# EAGLE board SerLCD_16x4_pb-v01 (EAGLE 7.6.0)
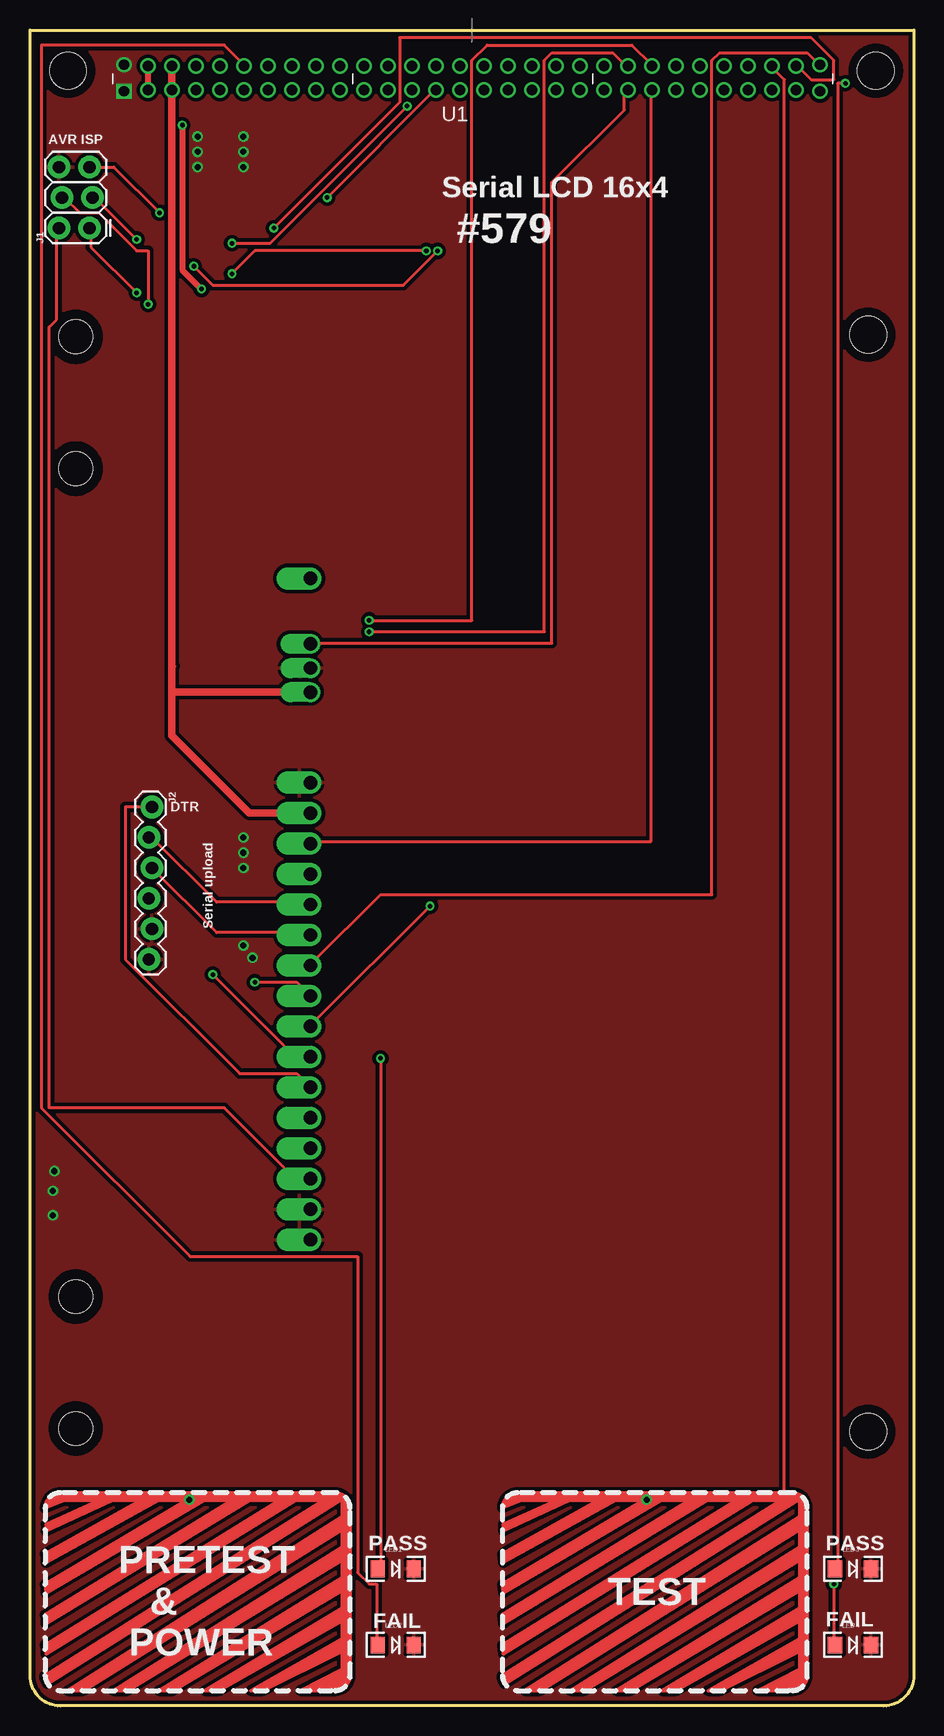
[diagram p0: board, top side]
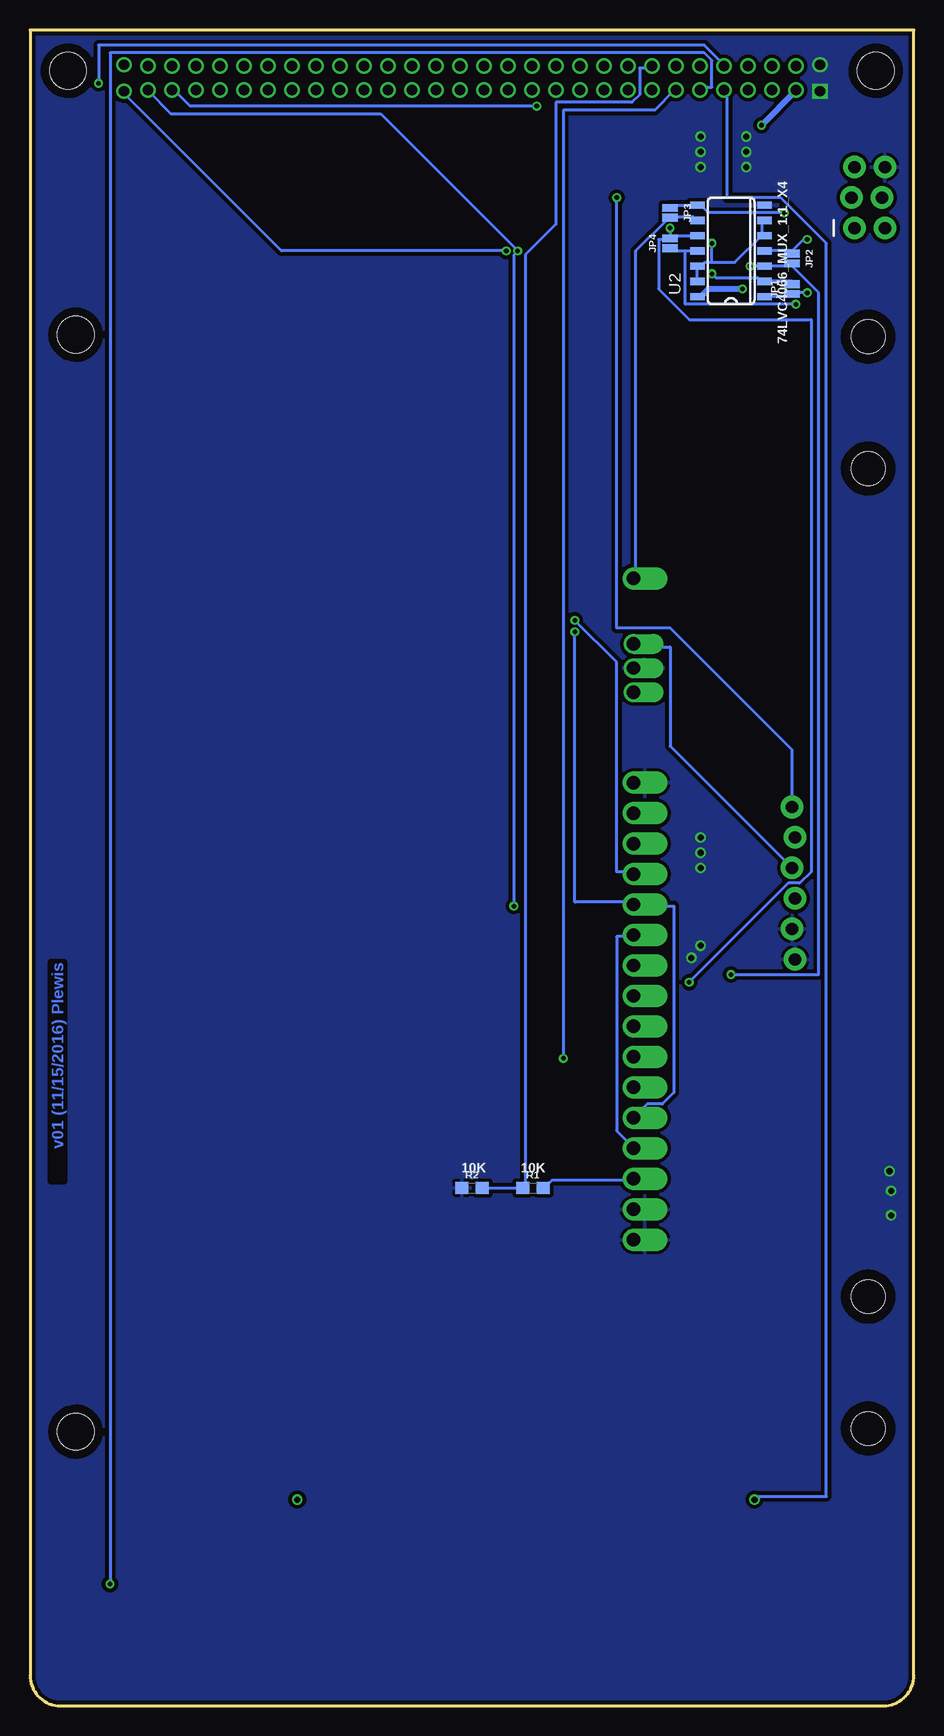
[diagram p1: board, bottom side, seen from below]

Size 73.66 x 139.7 mm. Coordinates in mm from the lower left corner, seen from the top.
Outline: 2.54,0 arc-90 0,2.54 0,139.7 73.66,139.7 73.66,2.54 arc-90 71.12,0 2.54,0
Copper layers (1*16): Top 0.035mm / dielectric 1.5mm / Bottom 0.035mm
Design rules "SparkFun-2-layer-TIGHT *": minimum track width 10mil, minimum drill 15mil, track to track 7mil, track to pad 7mil, pad to pad 7mil, via to via 7mil, smd to smd 7mil, copper to edge 7mil, drill to drill 7mil, minimum pad ring 7mil, minimum via ring 7mil, stop-mask expansion 4mil, vias tented up to drill 25mil, thermal gap 10mil
Net classes: 1 vcc1: width 0.203 mm; 3 VCC2: width 0.381 mm, drill 0.508 mm, clearance 0.254 mm to class 0; 8 eight_mil: width 0.203 mm, clearance 0.127 mm; 9 twelve_mil: width 0.305 mm, clearance 0.127 mm; 10 twenty_mil: width 0.508 mm, clearance 0.127 mm; 11 thirty_mil: width 0.762 mm, clearance 0.127 mm; 13 20_mil: width 0.508 mm, drill 0.508 mm

## Footprints (pad centres in the part's own frame; a part is rotated, then mirrored left to right if it is on the bottom)
CAPSENSE_BUTTON_PADS_ONLY = drill 0.508: CAPSENSE_PAD -0.686,7.036
2X3_LOCK = drill 1.016 pad 1.88: 1 0,0.127; 2 0,2.667; 3 2.54,-0.127; 4 2.54,2.413; 5 5.08,0.127; 6 5.08,2.667
1X06_LOCK = drill 1.016 pad 1.88: 1 0,0; 2 2.54,-0.254; 3 5.08,0; 4 7.62,-0.254; 5 10.16,0; 6 12.7,-0.254
SER_LCD_16X2 = drill 1.118 pad 1.88 offset: P$1 9.652,33.782; P$2 12.192,33.782; P$3 14.732,33.782; P$4 17.272,33.782; P$5 19.812,33.782; P$6 22.352,33.782; P$7 24.892,33.782; P$8 27.432,33.782; P$9 29.972,33.782; P$10 32.512,33.782; P$11 35.052,33.782; P$12 37.592,33.782; P$13 40.132,33.782; P$14 42.672,33.782; P$15 45.212,33.782; P$16 47.752,33.782; P$20 64.77,33.782 | drill 1.118 pad 1.524 offset: P$17 55.296,33.782; P$18 57.302,33.782; P$19 59.309,33.782
SMT-JUMPER_2_NC_PASTE_NO-SILK = smd 0.635 x 1.27: 1 -0.406,0; 2 0.406,0
LED-1206 = smd 1.2 x 1.4: A -1.5,0; C 1.5,0
0603 = smd 1.1 x 1: 1 -0.85,0; 2 0.85,0
FLYING_JALAPENO_V2_M = drill 0.85 square: 1 -29,-5.1 | drill 0.85: 2 -27,-5; 3 -25,-5; 4 -23,-5; 5 -21,-5; 6 -19,-5; 7 -17,-5; 8 -15,-5; 9 -13,-5; 10 -11,-5; 11 -9,-5; 12 -7,-5; 13 -5,-5; 14 -3,-5; 15 -1,-5; 16 1,-5; 17 3,-5; 18 5,-5; 19 7,-5; 20 9,-5; 21 11,-5; 22 13,-5; 23 15,-5; 24 17,-5; 25 19,-5; 26 21,-5; 27 23,-5; 28 25,-5; 29 27,-5; 30 29,-5.1; 31 -29,-2.9; 32 -27,-3; 33 -25,-3; 34 -23,-3; 35 -21,-3; 36 -19,-3; 37 -17,-3; 38 -15,-3; 39 -13,-3; 40 -11,-3; 41 -9,-3; 42 -7,-3; 43 -5,-3; 44 -3,-3; 45 -1,-3; 46 1,-3; 47 3,-3; 48 5,-3; 49 7,-3; 50 9,-3; 51 11,-3; 52 13,-3; 53 15,-3; 54 17,-3; 55 19,-3; 56 21,-3; 57 23,-3; 58 25,-3; 59 27,-3; 60 29,-2.9 | hole 3.048: 33.655,-3.404; -33.655,-3.404
SO14 = smd 0.6 x 1.2: 1 -3.175,-2.8; 2 -1.905,-2.8; 3 -0.635,-2.8; 4 0.635,-2.8; 5 1.905,-2.8; 6 3.175,-2.8; 7 4.445,-2.8; 8 4.445,2.8; 9 3.175,2.8; 10 1.905,2.8; 11 0.635,2.8; 12 -0.635,2.8; 13 -1.905,2.8; 14 -3.175,2.8
STAND-OFF-TIGHT = hole 3.048: 0,0
GOLD_HINDGE = hole 2.794: 3.81,4.077; 3.81,15.07

## Placement (x,y rotation side)
1  CAPSENSE_BUTTON_PAD_ONLY  [CAPSENSE_BUTTON_PADS_ONLY]  13.97,10.16 0 top
2  CAPSENSE_BUTTON_PAD_ONLY  [CAPSENSE_BUTTON_PADS_ONLY]  52.07,10.16 0 top
J1  AVR_PROG  [2X3_LOCK]  5.08,123.19 90 top
J2  [1X06_LOCK]  10.16,74.93 270 top
J3  SER_LCD16X2  [SER_LCD_16X2]  57.15,29.21 90 top
JP1  MISO  [SMT-JUMPER_2_NC_PASTE_NO-SILK]  10.16,118.11 90 bottom
JP2  SCK  [SMT-JUMPER_2_NC_PASTE_NO-SILK]  10.16,120.65 270 bottom
JP3  RST  [SMT-JUMPER_2_NC_PASTE_NO-SILK]  20.32,124.46 270 bottom
JP4  MOSI  [SMT-JUMPER_2_NC_PASTE_NO-SILK]  20.32,121.92 90 bottom
LED1  [LED-1206]  30.48,11.43 0 top
LED2  [LED-1206]  30.48,5.08 0 top
LED3  [LED-1206]  68.58,11.43 0 top
LED4  [LED-1206]  68.58,5.08 0 top
R1  10k  [0603]  31.75,43.18 0 bottom
R2  10k  [0603]  36.83,43.18 0 bottom
U1  5V Flying Jalapeno  [FLYING_JALAPENO_V2_M]  36.83,139.7 0 top
U2  74LVC4066_MUX_1:1_X4  [SO14]  15.24,120.65 90 bottom
U$3  [STAND-OFF-TIGHT]  69.85,114.3 0 top
U$6  GOLD_HINDGEPB  [GOLD_HINDGE]  0,99.06 0 top
U$7  GOLD_HINDGEPB  [GOLD_HINDGE]  0,19.05 0 top
U$8  [STAND-OFF-TIGHT]  69.85,22.86 0 top

## Library data of the parts
1 2 LED1-LED4 U1 U2 U$6 U$7 = Testing
J1 J2 = SparkFun-Connectors
J3 = SerLCD_dimensions
JP1-JP4 = SparkFun-Jumpers
R1 R2 = SparkFun-Resistors; PROD_ID: RES-00824
U$3 U$8 = SparkFun

## Nets
3.3_VCC: J1.2 J3.P$3 R1.2
5V_VIN [twenty_mil]: U1.2 U1.32 U2.14
CS: J3.P$10 U1.60
DTR_FJ: J2.1 J3.P$6 U1.14
GND [twelve_mil]: J1.6 J2.5 J2.6 J3.P$1 J3.P$2 J3.P$16 J3.P$18 LED1.C LED2.C LED3.C LED4.C R2.1 U1.1 U1.31 U2.7
MISO: J3.P$8 JP1.2 U1.29 U2.2
MISO_P: J1.1 JP1.1 U2.1
MOSI: J3.P$9 JP4.2 U1.59 U2.10
MOSI_P: J1.4 JP4.1 U2.11
N$1 [eight_mil]: 1.CAPSENSE_PAD U1.5
N$2: 2.CAPSENSE_PAD U1.58
N$3 [eight_mil]: LED1.A U1.7
N$4 [eight_mil]: LED2.A U1.36
N$5: LED3.A U1.35
N$6: LED4.A U1.6
N$7: R1.1 R2.2 U1.38
PGM_SWITCH_EN: U1.28 U2.5 U2.6 U2.12 U2.13
RAW_VIA_V2: J3.P$15 J3.P$17 U1.3 U1.33
RST: J3.P$20 JP3.2 U2.9
RST_P: J1.5 JP3.1 U2.8
RX1_FJ: J2.2 J3.P$5 J3.P$12 U1.52
SCK: J3.P$7 JP2.2 U1.30 U2.3
SCK_P: J1.3 JP2.1 U2.4
SCL: J3.P$13 U1.53
SDA: J3.P$14 U1.23
TX1_FJ: J2.3 J3.P$4 J3.P$11 J3.P$19 U1.22

## Tracks (layer width: path | path; a pad name or v marks a point on that pad's centre or on a via)
3.3_VCC
  Top 0.254: J1.2 2.22,123.19 2.22,115.57 1.59,114.94 1.59,49.85 16.19,49.85 21.91,44.13 23.18,44.13 J3.P$3
  Bottom 0.254: R1.2 30.8,43.18 30.16,43.81 23.5,43.81 J3.P$3
5V_VIN  (via drill 0.38)
  Top 0.508: v14.29,118.11 12.7,119.7 v12.7,131.76 | U1.32 9.84,136.53 9.84,134.94 U1.2
  Bottom 0.508: v14.29,118.11 17.14,118.11 17.78,117.47 U2.14 | v12.7,131.76 9.84,134.62 U1.2
CS
  Top 0.254: U1.60 65.72,136.84 64.77,137.79 57.47,137.79 56.83,137.16 56.83,67.63 29.21,67.63 23.5,61.91 J3.P$10
DTR_FJ  (via drill 0.38)
  Top 0.254: v24.77,125.73 33.66,134.62 U1.14 | J3.P$6 22.23,52.7 17.46,52.7 7.94,62.23 7.94,74.93 J2.1
  Bottom 0.254: v24.77,125.73 24.77,89.85 20.32,89.85 10.16,79.69 J2.1
GND  (via drill 0.51)
  other vias: 13.97,128.27 13.97,129.54 13.97,130.81 17.78,130.81 17.78,129.54 17.78,128.27 17.78,72.39 17.78,71.12 17.78,69.85 17.78,63.37 18.54,62.36 2.03,44.58 1.91,42.93 1.91,40.89
  pour Bottom (isolate 0.305): 0,0 0,139.7 73.66,139.7 73.66,0
  pour Top (isolate 0.305): 0,0 0,139.7 73.66,139.7 73.66,0
MISO  (via drill 0.38)
  Top 0.254: v16.83,119.38 18.73,121.28 v33.02,121.28 | v33.34,66.67 23.5,56.83 J3.P$8
  Bottom 0.254: JP1.2 10.16,118.75 U2.2 12.7,118.75 13.02,119.06 16.51,119.06 v16.83,119.38 | U1.29 63.82,134.62 61.91,132.72 44.45,132.72 v33.02,121.28 33.34,120.97 v33.34,66.67
MISO_P  (via drill 0.38)
  Top 0.254: v8.89,117.79 5.08,121.6 5.08,123.19 J1.1
  Bottom 0.254: U2.1 10.16,117.47 JP1.1 10.16,117.79 v8.89,117.79
MOSI  (via drill 0.38)
  Top 0.254: v20.32,123.19 30.8,133.67 30.8,139.06 65.09,139.06 66.99,137.16 66.99,135.57 65.09,135.57 64.14,136.53 U1.59 | J3.P$9 22.23,60.33 v18.73,60.33
  Bottom 0.254: 20.32,122.56 U2.10 | v20.32,123.19 20.32,122.56 | 20.32,122.56 JP4.2 20.32,122.24 21.27,122.24 21.27,118.11 18.73,115.57 8.57,115.57 8.57,69.53 9.53,68.58 10.48,68.58 v18.73,60.33
MOSI_P  (via drill 0.38)
  Top 0.254: v9.84,116.84 9.84,121.28 8.89,121.28 5.71,124.46 4.13,124.46 2.86,125.73 J1.4
  Bottom 0.254: 19.05,121.28 20.32,121.28 JP4.1 | 19.05,121.28 U2.11 | 19.05,121.28 19.05,116.84 v9.84,116.84
N$1
  Bottom 0.254: U1.5 15.56,134.62 15.56,125.73 11.11,125.73 7.3,121.92 7.3,17.46 13.02,17.46 1.CAPSENSE_PAD
N$2
  Top 0.254: U1.58 61.91,136.53 62.87,135.57 62.87,17.46 51.44,17.46 2.CAPSENSE_PAD
N$3  (via drill 0.38)
  Top 0.254: v29.21,53.98 29.21,11.43 LED1.A
  Bottom 0.254: v29.21,53.98 29.21,133.03 21.59,133.03 20,134.62 U1.7
N$4
  Top 0.254: LED2.A 28.89,5.08 28.89,10.16 28.26,10.16 27.3,11.11 27.3,37.47 13.34,37.47 0.95,49.85 0.95,138.43 16.19,138.43 17.78,136.84 U1.36
N$5  (via drill 0.38)
  Top 0.254: v67.94,135.25 67.31,135.25 67.31,11.43 LED3.A
  Bottom 0.254: v67.94,135.25 67.94,138.43 17.46,138.43 15.88,136.84 U1.35
N$6  (via drill 0.38)
  Top 0.254: v66.99,10.16 66.99,5.08 LED4.A
  Bottom 0.254: v66.99,10.16 66.99,137.79 17.46,137.79 16.83,137.16 16.83,134.94 17.78,134.94 U1.6
N$7
  Bottom 0.254: R2.2 R1.1 32.38,43.18 32.38,120.97 29.84,123.51 29.84,133.67 23.5,133.67 22.86,134.3 22.86,136.53 21.91,136.53 U1.38
PGM_SWITCH_EN  (via drill 0.38)
  Top 0.254: v31.43,133.35 20,121.92 v16.83,121.92
  Bottom 0.254: 12.7,122.56 12.7,123.83 U2.6 | U2.13 18.1,118.75 18.1,120.02 U2.12 17.78,120.02 17.46,120.33 16.83,120.33 | 12.7,122.56 14.92,120.33 16.83,120.33 | 12.7,122.56 U2.5 | v31.43,133.35 60.33,133.35 61.59,134.62 U1.28 | 16.83,120.33 v16.83,121.92
RAW_VIA_V2
  Top 0.254: 12.06,86.68 11.83,86.68
  Top 0.61: U1.33 U1.3 11.83,88.9 11.83,86.68 11.83,84.51 | J3.P$15 18.29,74.42 11.83,80.88 11.83,84.51 | J3.P$17 11.83,84.51
RST
  Bottom 0.254: 20.32,124.14 18.41,124.14 18.1,123.83 U2.9 | 20.32,124.14 23.18,121.28 23.18,93.98 J3.P$20 | 20.32,124.14 JP3.2
RST_P  (via drill 0.38)
  Top 0.254: v10.79,124.46 6.99,128.27 J1.5
  Bottom 0.254: JP3.1 20.32,125.09 U2.8 17.78,125.09 17.14,124.46 v10.79,124.46
RX1_FJ  (via drill 0.38)
  Top 0.254: v28.26,89.53 42.86,89.53 42.86,137.16 43.5,137.79 48.58,137.79 49.53,136.84 U1.52 | J2.2 10.16,72.39 15.56,66.99 23.18,66.99 J3.P$12
  Bottom 0.254: v28.26,89.53 28.26,66.99 23.5,66.99 J3.P$12 23.18,66.67 20,66.67 20,51.12 20.95,50.16 22.23,50.16 J3.P$5
SCK  (via drill 0.38)
  Top 0.254: v15.24,60.96 21.91,54.29 23.18,54.29 J3.P$7 | v33.97,121.28 31.11,118.43 15.24,118.43 v13.65,120.02
  Bottom 0.254: 10.16,120.02 U2.3 v13.65,120.02 | 10.16,120.02 7.94,117.79 7.94,60.96 v15.24,60.96 | 10.16,120.02 JP2.2 | v33.97,121.28 52.7,121.28 65.72,134.3 U1.30
SCK_P  (via drill 0.38)
  Top 0.254: v8.89,122.24 5.4,125.73 J1.3
  Bottom 0.254: 10.16,121.28 U2.4 | 10.16,121.28 9.21,122.24 v8.89,122.24 | 10.16,121.28 JP2.1
SCL  (via drill 0.38)
  Top 0.254: v28.26,90.49 36.83,90.49 36.83,137.16 38.1,138.43 50.16,138.43 51.75,136.84 U1.53
  Bottom 0.254: v28.26,90.49 24.77,87 24.77,69.53 23.5,69.53 J3.P$13
SDA
  Top 0.254: U1.23 51.75,134.62 51.75,72.07 23.5,72.07 J3.P$14
TX1_FJ
  Top 0.254: J2.3 15.56,64.45 23.18,64.45 J3.P$11 | U1.22 49.53,134.62 49.53,133.03 43.5,127 43.5,88.58 23.5,88.58 J3.P$19
  Bottom 0.254: J3.P$4 23.5,46.67 24.77,47.94 24.77,64.14 23.5,64.14 J3.P$11 | J2.3 20.32,80.01 20.32,88.27 23.18,88.27 J3.P$19

## Text on the board
Bottom: v01 (11/15/2016) Plewis
tPlace: AVR ISP | Serial LCD 16x4 | #579 | DTR | Serial upload | PASS | PASS | TEST | FAIL | FAIL | PRETEST / & / POWER
bPlace: 10K | 10K